# Altium PCB Brake By Wire.PcbDoc
Units mm, origin at the board's own origin, x right, y up, seen from the top; angles counter-clockwise.
Board outline 70 x 50 mm, 2 copper layers (Top Layer, Bottom Layer); 11 components, 15 nets, 84 pads, 7 vias.
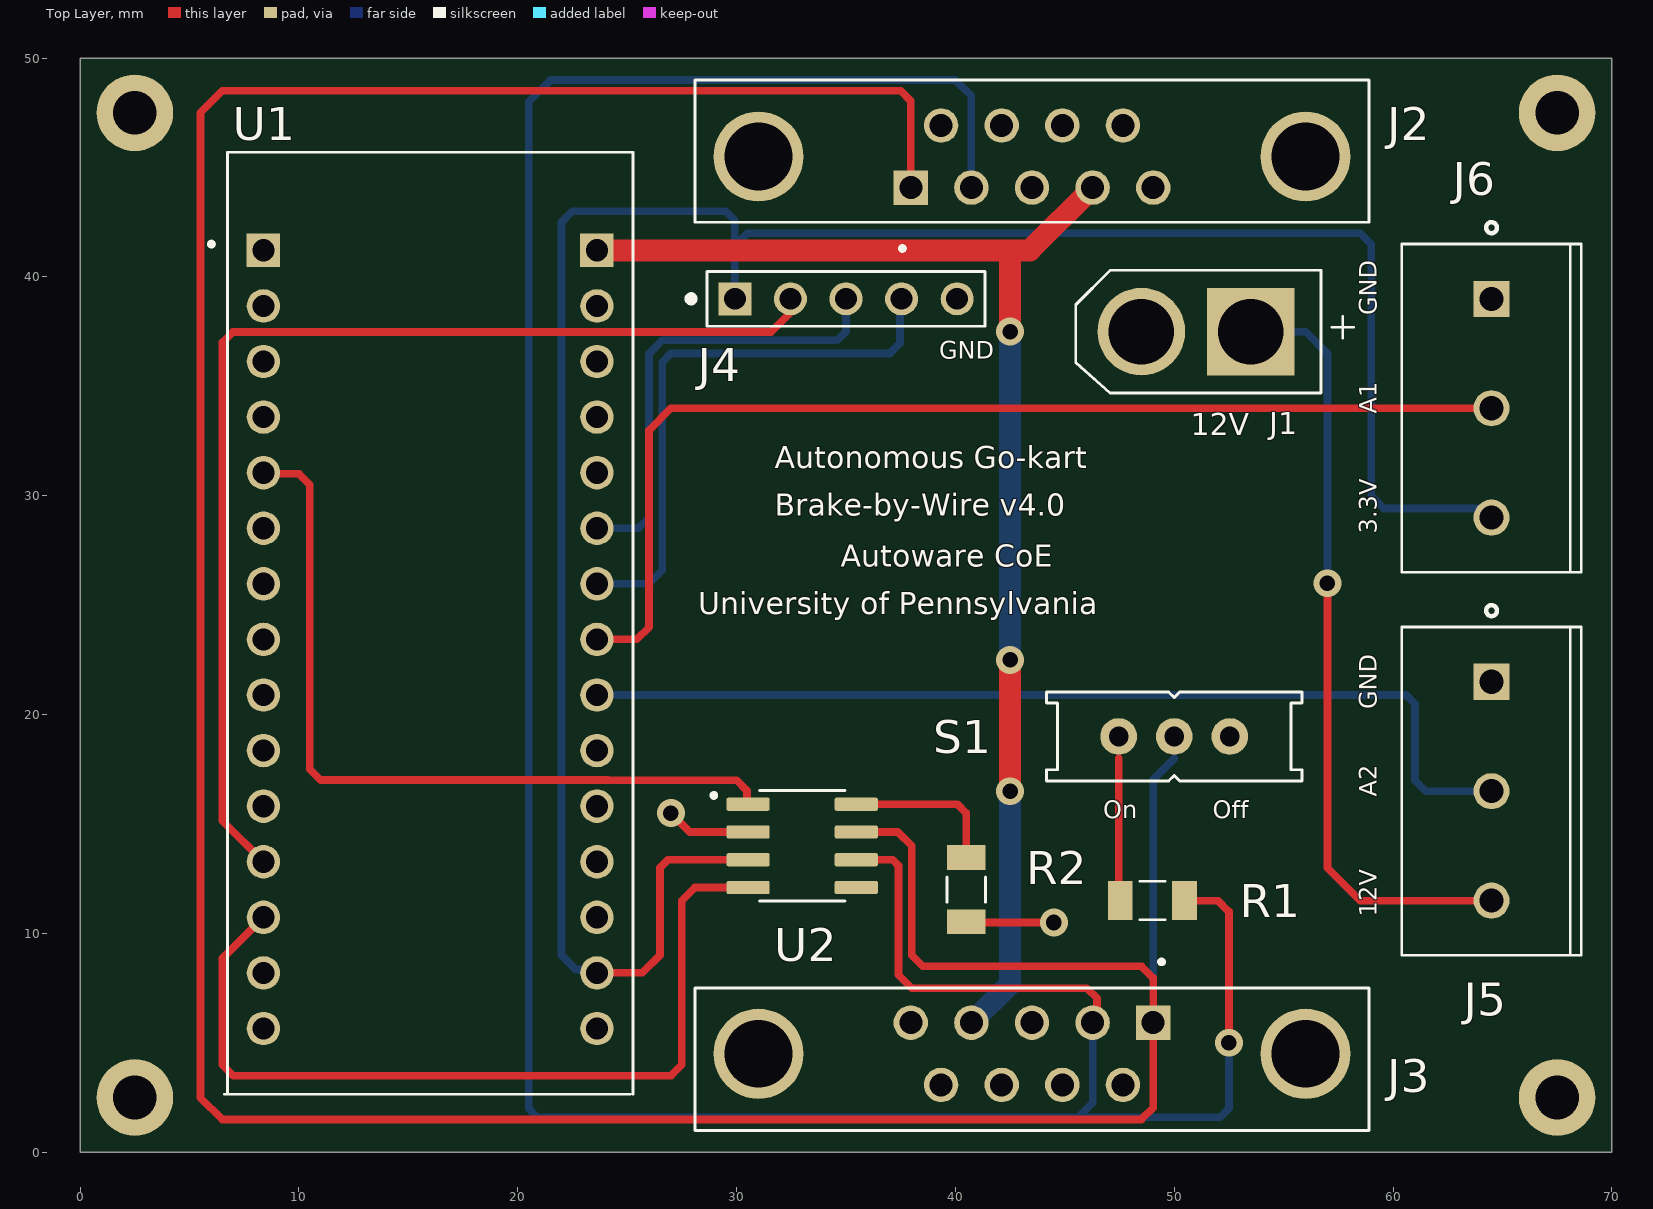
[diagram p0: Top Layer view]
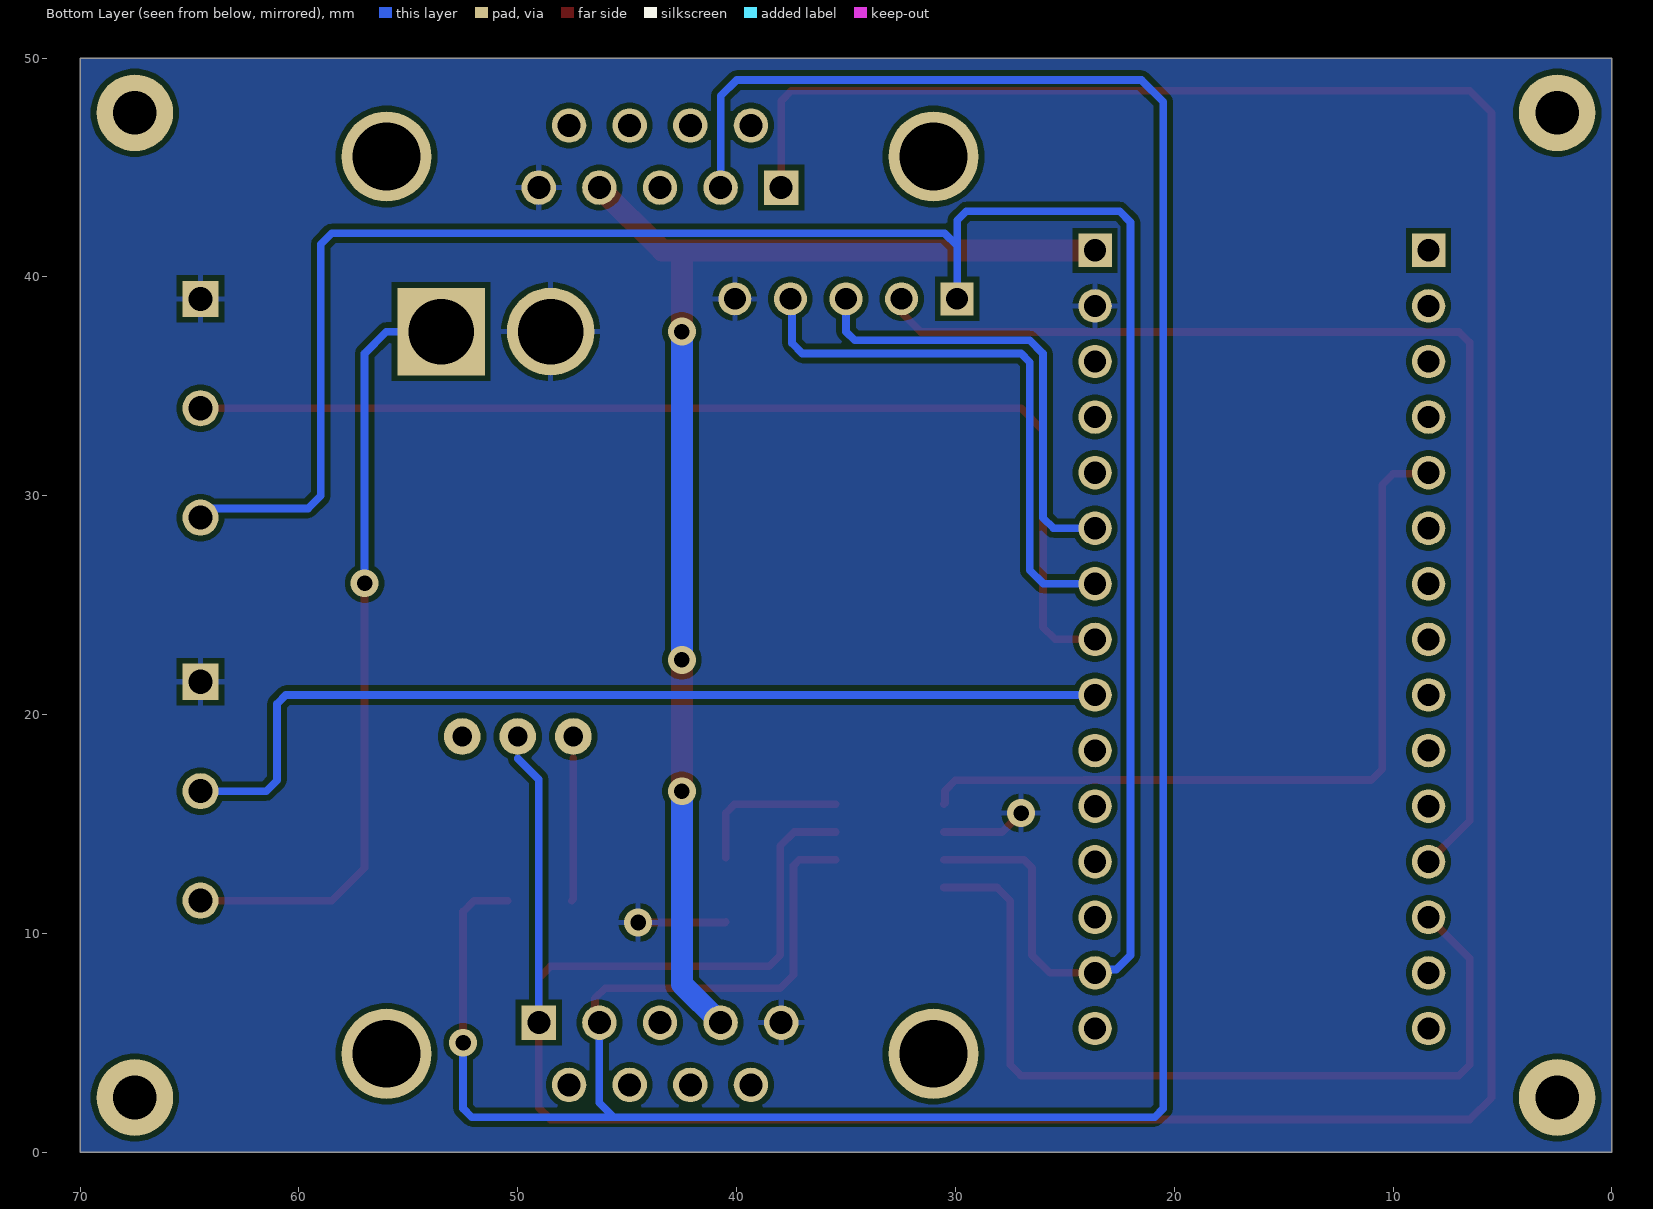
[diagram p1: Bottom Layer view, seen from below]

## Layer stack, top to bottom
Top Solder: solder mask 0.0102, Solder Resist, Dk 3.5
Top Layer: signal copper 0.0356
Dielectric 1: dielectric 0.32, FR-4, Dk 4.8
Bottom Layer: signal copper 0.0356
Bottom Solder: solder mask 0.0102, Solder Resist, Dk 3.5

## Board outline
0,0 0,50 70,50 70,0

## Design rules (kind name [scope] priority, off if disabled: settings)
Clearance [All] p1: gap=0.254 ignorepadtopadclearanceinfootprint=FALSE except(0: Arc-Hole Track-Hole SMDPad-Hole THPad-Hole Via-Hole Fill-Hole Poly-Hole Region-Hole Text-Hole)
HoleSize [All] p1: absolutevalues=TRUE maxlimit=5 minlimit=0.025 maxpercent=80.000 minpercent=20.000
PolygonConnect [All] p1: connectstyle=Relief reliefconductorwidth=0.254 reliefentries=4 polygonreliefangle="90 Angle" airgapwidth=0.254
RoutingVias [All] p1: holewidth=0.711 width=1.27 viastyle="Through Hole" minholewidth=0.711 minwidth=1.27 maxholewidth=0.711 maxwidth=1.27
SolderMaskExpansion [All] p1: expansion=0.102 istentingtop=FALSE
Width [All] p1: maxlimit=2 minlimit=0.254 preferedwidth=0.35 minimp=50.000000 maximp=50.000000 favimp=50.000000
29 further rules are at their usual default settings.

## Classes and differential pairs
component class Sheet1: J1 J2 J3 J5 J6 R1 R2 S1 U1 U2

## Components (designator, comment, footprint, x,y, rotation, side; value= is the part's Value field where it differs from the comment)
J1 "XT30-M" AMASS_XT60-M 49.9,37.5 r180 top
J2 "A-DF_09_A_KG-T2S" ASSMANN_A-DF_09_A_KG-T2S 43.5,45.5 r180 top
J3 "A-DF_09_A_KG-T2S" ASSMANN_A-DF_09_A_KG-T2S 43.5,4.5 r0 top
J4 "826629-5" TE_826629-5 29.92,39 r0 top
J5 "282836-3" TE_282836-3 64.5,16.5 r270 top
J6 "282836-3" TE_282836-3 64.5,34 r270 top
R1 "120" RESC3216X65N 49,11.5 r0 top
R2 "10K" RESC3216X65N 40.5,12 r270 top
S1 "EG1218" EG1218 50,19 r180 top
U1 "NUCLEO-L432KC" MODULE_NUCLEO-L432KC 16,25 r0 top
U2 "SN65HVD230QDR" SOIC127P599X175-8N 33,14 r0 top

## Footprints (in the part's own frame and the unit in brackets; to place one, negate y for a bottom-side part, rotate by r counter-clockwise, add the part's x,y. Pads: shape width x height; smd on the part's side, far side on the other; paste and mask are expansions set on the pad)
AMASS_XT60-M [mm]
  round 4 hole 3: N(1.4,0)
  rect 4x4 hole 3: P(-3.6,0)
  silkscreen extent -8.3,-2.8 4.4,2.8
ASSMANN_A-DF_09_A_KG-T2S [mm]
  rect 1.575x1.575 / inner round 1.575 / far side rect 1.575x1.575 hole 1.05: 1(5.54,1.42)
  round 1.575 hole 1.05: 2(2.77,1.42) 3(0,1.42) 4(-2.77,1.42) 5(-5.54,1.42) 6(4.155,-1.42) 7(1.385,-1.42) 8(-1.385,-1.42) 9(-4.155,-1.42)
  round 4.116 hole 3.1: S1(-12.495,0) S2(12.495,0)
  silkscreen extent -15.41,-3.5 15.41,4.3
EG1218 [mil]
  round 66 hole 35.43: O(-100,0) P(0,0) S(100,0)
  silkscreen extent -230,-80 230,80
MODULE_NUCLEO-L432KC [mm]
  rect 1.53x1.53 hole 1.02: CN3_1(-7.62,16.215) CN4_1(7.62,16.215)
  round 1.53 hole 1.02: CN3_2(-7.62,13.675) CN3_3(-7.62,11.135) CN3_4(-7.62,8.595) CN3_5(-7.62,6.055) CN3_6(-7.62,3.515) CN3_7(-7.62,0.975) CN3_8(-7.62,-1.565) CN3_9(-7.62,-4.105) CN3_10(-7.62,-6.645) CN3_11(-7.62,-9.185) CN3_12(-7.62,-11.725) CN3_13(-7.62,-14.265) CN3_14(-7.62,-16.805) CN3_15(-7.62,-19.345) CN4_2(7.62,13.675) CN4_3(7.62,11.135) CN4_4(7.62,8.595) CN4_5(7.62,6.055) CN4_6(7.62,3.515) CN4_7(7.62,0.975) CN4_8(7.62,-1.565) CN4_9(7.62,-4.105) CN4_10(7.62,-6.645) CN4_11(7.62,-9.185) CN4_12(7.62,-11.725) CN4_13(7.62,-14.265) CN4_14(7.62,-16.805) CN4_15(7.62,-19.345)
  silkscreen extent -10.1,-22.35 9.27,20.7
RESC3216X65N [mm]
  rect 1.13x1.77 smd: 1(-1.47,0) 2(1.47,0)
  silkscreen extent -0.58,-0.88 0.58,0.88
SOIC127P599X175-8N [mm]
  rrect25% 1.97x0.6 smd: 1(-2.47,1.905) 2(-2.47,0.635) 3(-2.47,-0.635) 4(-2.47,-1.905) 5(2.47,-1.905) 6(2.47,-0.635) 7(2.47,0.635) 8(2.47,1.905)
  silkscreen extent -4.14,-2.52 1.95,2.52, body extent -3,-2.45 3,2.45, height 1.75
TE_282836-3 [mm]
  rect 1.65x1.65 hole 1.1: 1(-5,0)
  round 1.65 hole 1.1: 2(0,0) 3(5,0)
  silkscreen extent -8.5,-4.1 7.5,4.1
TE_826629-5 [mm]
  rect 1.508x1.508 hole 1: 1(0,0)
  round 1.508 hole 1: 2(2.54,0) 3(5.08,0) 4(7.62,0) 5(10.16,0)
  silkscreen extent -2.15,-1.25 11.43,1.25

## Part data
J1: "Plug; DC supply; XT60; male; PIN: 2; for cable; soldered; 30A; 500V", Package=Package, Availability="Not in stock", Check_prices=https://www.snapeda.com/parts/XT60-M/AMASS/view-part/?ref=eda, MF=AMASS, MP=XT60-M, Price=None, SnapEDA_Link=https://www.snapeda.com/parts/XT60-M/AMASS/view-part/?ref=snap
J2 J3: "9 Position D-Sub Receptacle, Female Sockets Connector", Package=None, Availability="In Stock", Check_prices=https://www.snapeda.com/parts/A-DF%2009%20A/KG-T2S/Assmann+WSW+Components/view-part/?ref=eda, MF="Assmann WSW", MP="A-DF 09 A/KG-T2S", Price=None, Purchase-URL="https://pricing.snapeda.com/search/part/A-DF 09 A/KG-T2S/?ref=eda", SnapEDA_Link=https://www.snapeda.com/parts/A-DF%2009%20A/KG-T2S/Assmann+WSW+Components/view-part/?ref=snap
J4: "Board-To-Board Connector, AMPMODU MOD II Series, Through Hole, Header, 5, 2.54 mm", Package=None, Availability=Unavailable, Centerline_Pitch="2.54 mm[.1 in]", EU_RoHS_Compliance=Compliant, MF="TE Connectivity", MP=826629-5, Number_of_Positions=5, Price=None, Product_Type=Connector, SnapEDA_Link=https://www.snapeda.com/parts/826629-5/TE%20Connectivity%20AMP%20Connectors/view-part/905319/?ref=snap, TE_purchase_URL=https://www.te.com/usa-en/product-826629-5.html?te_bu=Cor&te_type=disp&te_campaign=seda_glo_cor-seda-global-disp-prtnr-fy19-seda-model-bom-cta_sma-317_1&elqCampaignId=32493
J5 J6: "TERM BLOCK 3POS SIDE ENTRY 5MM", Package=None, Availability=Unavailable, MP=282836-3, Price=None
R1 R2: library part KTR18EZPF9530, Package=None, Availability=Unavailable, MP=KTR18EZPF9530, Price=None
S1: "<b>SLIDING SWITCH</b><p> 0.1\" spacing through hole, vertical SPDT slide switch <p>http://www.ladyada.net/library/pcb/eaglelibrary.html</p>", Package=None, Availability=Unavailable, MP=EG1218, Price=None
U1: "STM32 Nucleo-32 development board with STM32L432KC MCU, supports Arduino connectivity", Package=None, Availability=Unavailable, MP=NUCLEO-L432KC, Price=None
U2: "3.3-V CAN Transceiver with Standby Mode 8-SOIC -40 to 125", Package="SOIC-8 Texas Instruments", Availability=Good, Check_prices=https://www.snapeda.com/parts/SN65HVD230QDR/Texas%20Instruments/view-part/1178075/?ref=eda, MF="Texas Instruments", MP=SN65HVD230QDR, Price=None, Purchase-URL=https://pricing.snapeda.com/search/part/SN65HVD230QDR/?ref=eda, SnapEDA_Link=https://www.snapeda.com/parts/SN65HVD230QDR/Texas%20Instruments/view-part/1178075/?ref=snap

## Free pads (board coordinates)
  round 3.5 hole 2: 1(2.5,2.5) 2(67.5,2.5) 3(67.5,47.5) 4(2.5,47.5)

## Via types
v1: diameter 1.27, hole 0.711, Top Layer to Bottom Layer, 7 vias

## Nets (pads, with @x,y where several pads share a name; then routed paths per layer and width w, separated by ;. In a path a pad name is that pad's centre, name@x,y a point inside that pad or via, vN(x,y) a via of type N, cw(c..) or ccw(c..) an arc to the next point about the centre after c; other vN are vias at no path point)
3.3V: J4.1 J6.3 U1.CN4_14 U2.3 | length 105.5
  Top Layer w0.35: U1.CN4_14 25.695,8.195 26.5,9 26.5,13 26.865,13.365 U2.3
  Bottom Layer w0.35: U1.CN4_14 23.465,8.35 22.65,8.35 22,9 22,42.5 22.5,43 29.5,43 29.92,42.58 29.92,41.42 ; J4.1 29.92,41.42 ; J6.3@64.5,29.5 64.42,29.42 59.58,29.42 59,30 59,41.5 58.5,42 30.5,42 29.92,41.42
5V: J2.4 J3.4 U1.CN4_1 | length 60.3
  Top Layer w0.35: U1.CN4_1 U1.CN4_1@23.835,41 ; 42.285,41.215 42.5,41
  Top Layer w1: U1.CN4_1 42.285,41.215 43.405,41.215 J2.4 ; v1(42.5,16.5) v1(42.5,22.5) ; v1(42.5,37.5) 42.5,41
  Bottom Layer w1: J3.4 42.5,7.69 v1(42.5,16.5) ; v1(42.5,22.5) v1(42.5,37.5)
12V: J1.P J5.3 | length 35.5
  Top Layer w0.35: v1(57,26) 57,13 58.5,11.5 J5.3
  Bottom Layer w0.35: J1.P 56,37.5 57,36.5 v1(57,26)
A1: J6.2 U1.CN4_8 | length 50.5
  Top Layer w0.35: U1.CN4_8 25.435,23.435 26,24 26,33 27,34 J6.2
A2: J5.2 U1.CN4_9 | length 44.8
  Bottom Layer w0.35: U1.CN4_9 60.605,20.895 61,20.5 61,17 61.5,16.5 J5.2
CAN_HIGH: J2.1 J3.1 S1.P U2.7 | length 163.9
  Top Layer w0.35: U2.7 37.365,14.635 38,14 38,9 38.5,8.5 48.5,8.5 49.04,7.96 J3.1 49.04,2.04 48.5,1.5 6.5,1.5 5.5,2.5 5.5,47.5 6.5,48.5 37.5,48.5 37.96,48.04 J2.1
  Bottom Layer w0.35: J3.1 49.04,17.032 50,17.992 50,18
CAN_LOW: J2.2 J3.2 R1.2 U2.6 | length 137
  Top Layer w0.35: U2.6 37.135,13.365 37.396,13.104 37.396,8.104 38,7.5 46,7.5 46.473,7.027 46.473,6.123 J3.2 ; R1.2 52,11.5 52.5,11 v1(52.5,5)
  Bottom Layer w0.35: J2.2 40.73,48.27 40,49 21.5,49 20.5,48 20.5,2 20.896,1.604 45.604,1.604 ; J3.2 46.27,2.27 45.604,1.604 ; v1(52.5,5) 52.5,2 52.104,1.604 45.604,1.604
CAN_RX: U1.CN3_13 U2.4 | length 39.7
  Top Layer w0.35: U1.CN3_13 6.5,8.855 6.5,4 7,3.5 27,3.5 27.5,4 27.5,11.5 28.095,12.095 U2.4
CAN_TX: U1.CN3_5 U2.1 | length 36.4
  Top Layer w0.35: U1.CN3_5 8.435,31 10,31 10.5,30.5 10.5,17.5 10.991,17.009 24.115,17.009 24.124,17 30,17 30.475,16.525 30.475,15.96 U2.1
ENABLE: J4.2 U1.CN3_12 | length 52.4
  Top Layer w0.35: 6.5,15.5 6.5,15.155 ; U1.CN3_12 6.5,15.155 ; J4.2@32.238,38.778 J4.2 32.46,38.371 31.57,37.481 6.981,37.481 6.5,37 6.5,15.155
  Bottom Layer w0.35: J4.2@32.426,38.966 J4.2
GND: J1.N J2.5 J3.5 J4.5 J5.1 J6.1 R2.2 U1.CN4_2 U2.2 | length 7.9
  Top Layer w0.35: v1(27,15.5) 27.865,14.635 U2.2 ; R2.2 40.53,10.5 v1(44.5,10.5)
NetR1_1: R1.1 S1.S | length 6.5
  Top Layer w0.35: 47.46,18 47.46,11.57 R1.1
NetR2_1: R2.1 U2.8 | length 7.2
  Top Layer w0.35: U2.8 40.095,15.905 40.5,15.5 R2.1
OUT1: J4.3 U1.CN4_6 | length 21
  Bottom Layer w0.35: U1.CN4_6 25.515,28.515 26,29 26,36.5 26.604,37.104 34.604,37.104 35,37.5 J4.3
OUT2: J4.4 U1.CN4_7 | length 26
  Bottom Layer w0.35: U1.CN4_7 25.975,25.975 26.604,26.604 26.604,36.104 27,36.5 37,36.5 37.466,36.966 37.466,38.926 J4.4
pads on no net: J2.3 J2.6 J2.7 J2.8 J2.9 J2.S1 J2.S2 J3.3 J3.6 J3.7 J3.8 J3.9 J3.S1 J3.S2 S1.O U1.CN3_1 U1.CN3_2 U1.CN3_3 U1.CN3_4 U1.CN3_6 U1.CN3_7 U1.CN3_8 U1.CN3_9 U1.CN3_10 U1.CN3_11 U1.CN3_14 U1.CN3_15 U1.CN4_3 U1.CN4_4 U1.CN4_5 U1.CN4_10 U1.CN4_11 U1.CN4_12 U1.CN4_13 U1.CN4_15 U2.5

## Polygon pours and split planes (outlines as drawn)
GND on Bottom Layer "NONET_L02_P-001" (solid, pour order 0): 0,50 70,50 70,0 0,0

## Silkscreen, mask and mechanical layers (free items; w line width, h text height)
Top Overlay:
  text "GND" at 59.246,38.254 h0.8 r90
  text "GND" at 39.254,36.254 h0.8
  text "A1" at 59.246,33.754 h0.8 r90
  text "12V" at 50.754,32.754 h1
  text "Autonomous Go-kart" at 31.754,31.254 h1
  text "Brake-by-Wire v4.0" at 31.754,29.087 h1
  text "3.3V" at 59.246,28.254 h0.8 r90
  text "Autoware CoE" at 34.754,26.754 h1
  text "University of Pennsylvania" at 28.254,24.587 h1
  text "GND" at 59.246,20.254 h0.8 r90
  text "A2" at 59.246,16.254 h0.8 r90
  text "On" at 46.754,15.254 h0.8
  text "Off" at 51.754,15.254 h0.8
  text "12V" at 59.246,10.754 h0.8 r90
Mechanical 1:
  lines w0.001: 0,0 70,0 ; 0,0 0,50 ; 0,0 70,0 ; 0,0 0,50 ; 0,50 70,50 ; 0,50 70,50 ; 70,0 70,50 ; 70,0 70,50
  lines w0.254: 0,0 70,0 70,50 0,50 0,0